# Allegro board LNAv2.brd
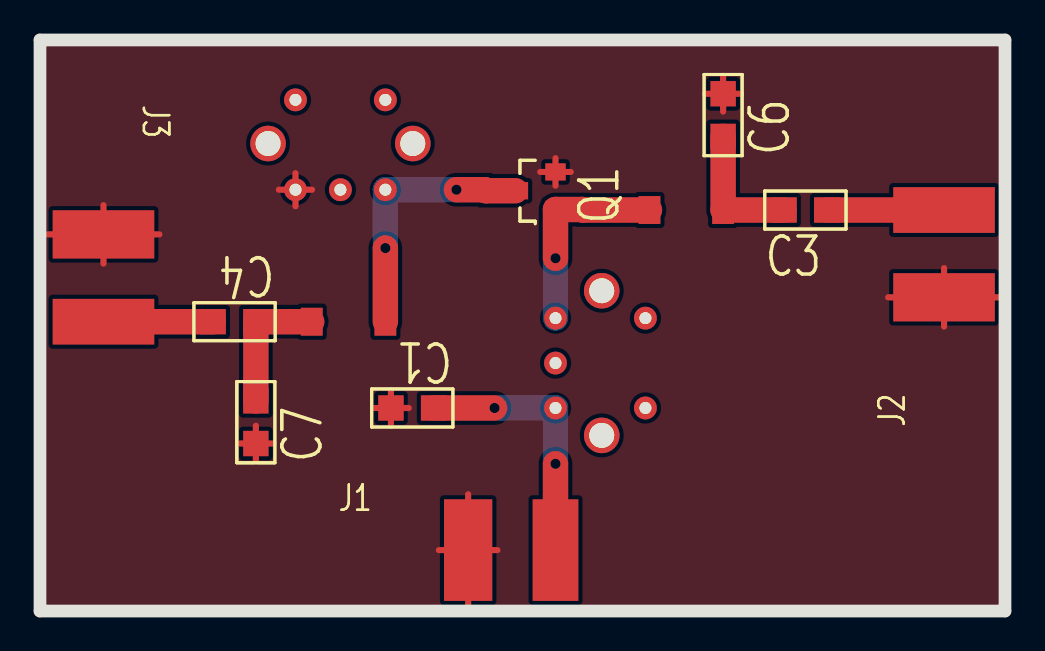
[diagram p0: board, top side]
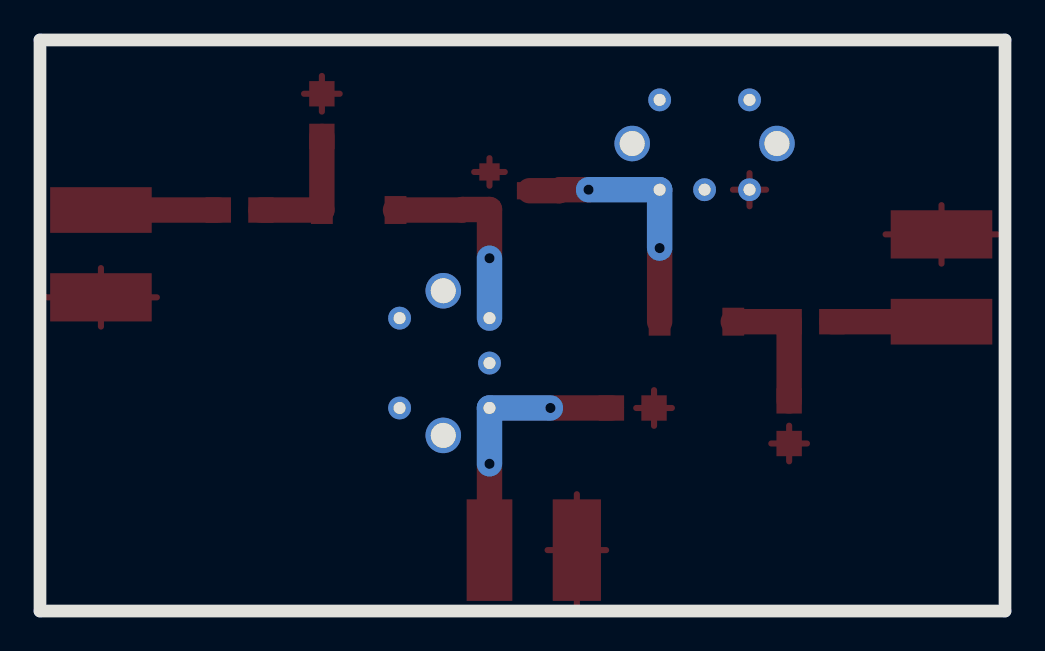
[diagram p1: board, bottom side, seen from below]

Outline 48.26 x 28.57 mm; copper layers: TOP, BOTTOM. Coordinates in mm from the lower left corner of the outline.
Outline path: 0,28.57 48.26,28.57 48.26,0 0,0 0,28.57

## Design rules (mm)
constraint set DEFAULT: min track width 0.305

## Placement (name value [footprint] x y rotation side)
C1  1n  [SMC0805]  19.69 10.16 180 top
C2  1n  [SMC_TRIM]  30.48 20.07 90 top
C3  1n  [SMC0805]  37.21 20.07 0 top
C4  1n  [SMC0805]  10.8 14.48 180 top
C5  1n  [SMC_TRIM]  13.59 14.48 90 top
C6  1n  [SMC0805]  34.16 23.75 90 top
C7  1n  [SMC0805]  10.8 8.38 90 top
J1  2Pin Header  [SMA_440W_200L]  20.19 5.59 0 top
J2  2Pin Header  [SMA_440W_200L]  42.67 14.48 90 top
J3  2Pin Header  [SMA_440W_200L]  5.72 20.07 270 top
L1  7M3  [7M3_INDUCTOR_TRIM]  25.78 10.16 90 top
L2  7M3  [7M3_INDUCTOR_TRIM]  17.27 21.08 180 top
Q1  MMFB5486  [SMSOT23DSG]  25.78 21.97 90 top

## Library data of the parts
C1-C7 = C
J1-J3 = 2Pin Header
L1 L2 = 7M3_Trimmer
Q1 = JFET N DSG_3

## Footprints (pads in the part's own frame, mm; a bottom-side part is the same pattern mirrored in y, then rotated)
7M3_INDUCTOR_TRIM
  round 1.143 hole 0.599: 1(0,0) 2(4.496,0) 3(0,-4.496) 4(4.496,-4.496) 7(2.248,0)
  round 1.778 hole 1.25: 5(-1.372,-2.311) 6(5.867,-2.311)
SMA_440W_200L
  rect 2.286x5.08 smd: 1(5.588,-2.54)
  rect 2.413x5.08 smd: 2(1.219,-2.54)
SMC0805
  rect 1.27x1.27 smd: 1(0,0) 2(2.134,0)
SMC_TRIM
  rect 1.397x1.092 smd: 1(0,0) 2(0,-3.683)
SMSOT23DSG
  rect 0.864x1.016 smd: D(-1.88,0) S(0,0)
  rect 0.864x1.27 smd: G(-0.94,2.007)

## Nets
GND: C1.2 C6.2 C7.1 J1.2 J2.2 J3.2 L2.2 Q1.S
N00631: C1.1 J1.1 L1.1
N00774: C4.1 C5.1 C7.2
N00788: C4.2 J3.1
N00792: C2.2 C3.1 C6.1
N00806: C3.2 J2.1
N01379: C2.1 L1.2 Q1.D
N01421: C5.2 L2.1 Q1.G

Pads without a net: L1 3 4 5 6 7; L2 3 4 5 6 7

## Via types
v1: diameter 0.762, hole 0.508, TOP to BOTTOM, 5 vias

## Routing (per net, layer and track width the routed paths; a pad name or vN(x,y) marks a point on that pad's centre or on a via; arc(x,y) is an arc through that point)
GND: length 42.5
  TOP w0.305: C1.2 18.44,10.16 ; C1.2 16.66,10.16 ; C1.2 17.55,11.05 ; C1.2 17.55,9.27 ; J1.2 21.41,5.84 ; J1.2 22.88,3.05 ; J1.2 19.95,3.05 ; J1.2 21.41,0.25 ; 33.27,25.88 C6.2 ; C6.2 35.05,25.88 ; C6.2 34.16,24.99 ; C6.2 34.16,26.77 ; 25.78,21.28 Q1.S ; Q1.S 25.02,21.97 ; Q1.S 26.55,21.97 ; Q1.S 25.78,22.66 ; J3.2 3.18,20.31 ; J3.2 3.18,17.38 ; J3.2 5.97,18.85 ; J3.2 0.38,18.85 ; J2.2 45.21,17.16 ; J2.2 48.01,15.7 ; J2.2 42.42,15.7 ; J2.2 45.21,14.23 ; L2.2 13.6,21.08 ; L2.2 12.78,20.25 ; L2.2 11.95,21.08 ; L2.2 12.78,21.91 ; 10.8,7.49 C7.1 ; C7.1 11.69,8.38 ; C7.1 9.9,8.38 ; C7.1 10.8,9.27
N00631: length 13.2
  TOP w1.27: v1(25.78,7.37) J1.1 ; v1(22.73,10.16) C1.1
  BOTTOM w1.27: v1(22.73,10.16) L1.1 v1(25.78,7.37)
N00774: length 6.8
  TOP w1.27: C5.1 C4.1 C7.2
N00788: length 5.5
  TOP w1.27: C4.2 3.18,14.48
N00792: length 6.7
  TOP w1.27: C6.1 C2.2 C3.1
N00806: length 5.9
  TOP w1.27: J2.1 C3.2
N01379: length 10.1
  TOP w1.27: C2.1 27.15,20.07 27.13,20.09 Q1.D v1(25.78,17.65)
  BOTTOM w1.27: L1.2 v1(25.78,17.65)
N01421: length 13.1
  TOP w1.27: Q1.G 22.3,21.03 22.25,21.08 v1(20.83,21.08) ; v1(17.27,18.16) C5.2
  BOTTOM w1.27: v1(20.83,21.08) L2.1 v1(17.27,18.16)

## Copper pours and planes (outline as drawn; the poured copper is in the pictures)
GND on TOP: 0.05,28.64 0.05,-0.01 48.31,-0.01 48.31,28.64
